# Altium PCB 388D_Control_v1_PCB1_1.PcbDoc (part 3 of 5)
Units mil, origin at the board's own origin, x right, y up, seen from the top; angles counter-clockwise.
Board outline 3431 x 3800 mil, 6 copper layers (Top Layer, Singal Layer 2, Signal layer 3, Signal Layer 4, Signal Layer 5, Bottom Layer), stack 32.7 mil thick; 270 components, 383 nets, 1462 pads, 899 vias.
Unrouted connection lines stored in the file: 19.
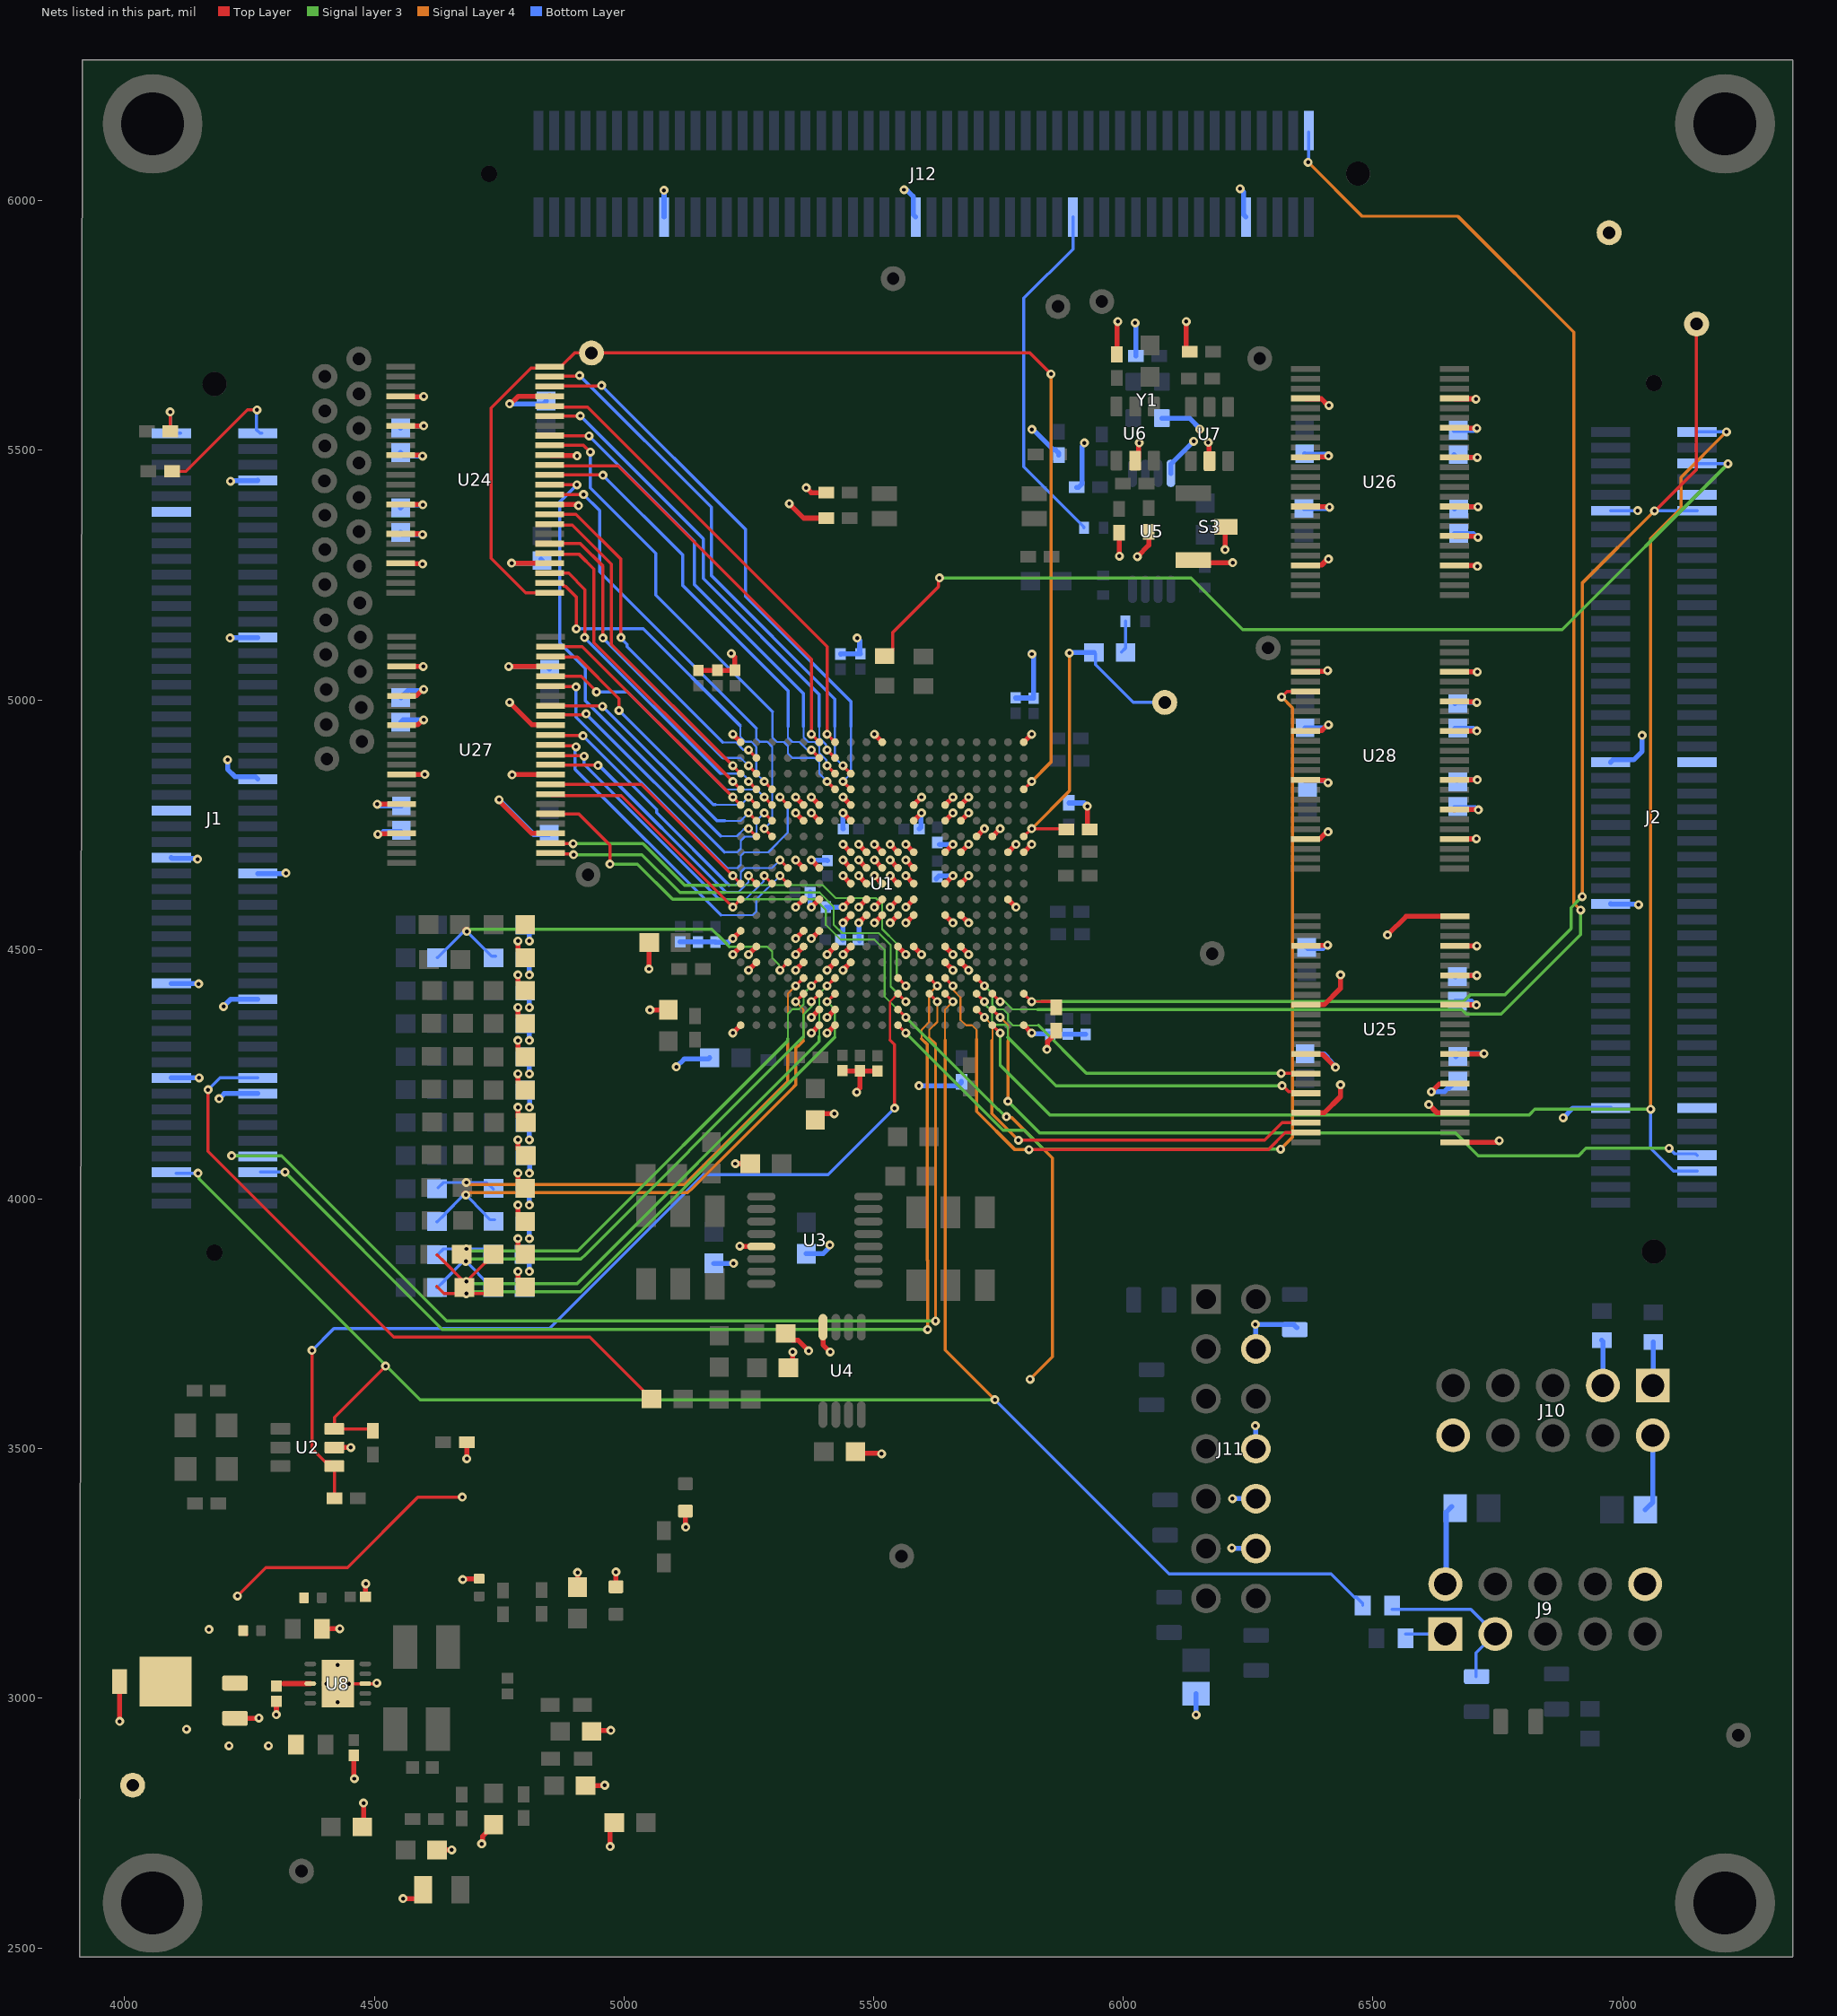
[diagram p6: the nets of this part, all layers, seen from the top]

## Via types
v1: diameter 18, hole 8, Top Layer to Bottom Layer, tented both sides, 899 vias

## Nets (pads, with @x,y where several pads share a name; then routed paths per layer and width w, separated by ;. In a path a pad name is that pad's centre, name@x,y a point inside that pad or via, vN(x,y) a via of type N, cw(c..) or ccw(c..) an arc to the next point about the centre after c; other vN are vias at no path point) (continued)
C4C5_P: C21.1 R28.1 U1.R4 | length 855.7
  Top Layer w6.25: v1(5312.45,4458.76) U1.R4@5328.2,4474.51
  Signal layer 3 w4: 5211.18,4505.74 5286.9,4505.74 5296.7,4495.93 5296.7,4484.43 ; 5296.7,4483.2 5305.77,4474.13 5310.19,4469.71 5310.19,4461.02 v1@5310.55,4460.66
  Signal layer 3 w6.25: v1(4685.32,4536.47) 4688.49,4536.47 4692.8,4540.77 5176.27,4540.77 5197.4,4519.65 5201.84,4515.2 5201.84,4515.07 5211.18,4505.74 ; v1@5310.55,4460.66 v1(5312.45,4458.76)
  Bottom Layer w6: R28.1@4626.07,4483.92 4627.06,4483.92 4677.31,4534.17 4683.02,4534.17 v1(4685.32,4536.47) 4735.11,4486.67 C21.1@4742.84,4486.67
CM_RX: J2.96 R169.2 | length 2026.1
  Top Layer w6.25: R169.2@5522.01,5087.63 5525.94,5087.63 5538.57,5100.25 5538.57,5135.57 5629.76,5226.76 5629.76,5242.25 v1(5632.01,5244.5)
  Signal layer 3 w6.25: v1(5632.01,5244.5) 6135.5,5244.5 6239,5141 6879,5141 v1(7211,5473)
  Bottom Layer w6.25: J2.96@7149.24,5473.57 7149.8,5473 v1(7211,5473)
CPU1_RX: J9.1 R165.2 | length 79.5
  Bottom Layer w6.25: R165.2@6565.53,3129 J9.1@6645,3129
CPU1_TX: J9.3 R159.1 R166.2 | length 328.1
  Bottom Layer w6.25: R166.2@6538.53,3178 6696,3178 J9.3@6744.67,3129.33 ; R159.1@6706.69,3043.78 6706.69,3091.35 J9.3@6744.67,3129.33 ; J9.3@6745,3129 J9.3@6744.67,3129.33
CPU2_RX: J10.1 R164.2 | length 87.9
  Bottom Layer w10: J10.1@7060.4,3626.64 7061.4,3627.64 R164.2@7061.4,3714.11
CPU2_TX: J10.3 R163.2 | length 91.3
  Bottom Layer w10: R163.2@6958.4,3717.11 6960.4,3715.11 J10.3@6960.4,3626.64
D0D1_N: C10.1 R32.1 U1.U5 | length 1115.1
  Top Layer w6.25: v1(5343.95,4395.77) U1.U5@5359.7,4411.52
  Signal Layer 4 w4: v1(5343.95,4395.77) 5359.4,4380.31 5359.4,4316.74
  Signal Layer 4 w6.25: v1@4682.17,4012.06 4683.51,4010.72 4688.74,4010.72 4690.8,4012.77 5127.68,4012.77 5137.19,4022.29 5334.93,4220.03 5344.45,4229.55 5344.45,4303.08 5348.11,4306.74 5349.4,4306.74 5359.4,4316.74
  Bottom Layer w6: R32.1@4625.09,3954.59 4626.07,3954.59 4641.77,3970.29 4641.77,3971.28 4676.67,4006.17 4681.02,4006.17 v1(4683.32,4008.47) 4683.49,4008.47 4721.66,3970.3 4721.66,3969.48 4732.46,3958.67 C10.1@4740.84,3958.67
D0D1_P: C22.1 R31.1 U1.T5 | length 1071.3
  Top Layer w6.25: v1(5343.95,4427.27) U1.T5@5359.7,4443.01
  Signal Layer 4 w4: 5328.2,4317.03 5328.2,4411.52 v1(5343.95,4427.27)
  Signal Layer 4 w6.25: v1(4684.43,4033.32) 4687.61,4033.32 4691.91,4029.02 5120.94,4029.02 5328.2,4236.28 5328.2,4317.03
  Bottom Layer w6: v1(4684.43,4033.32) 4724.93,4033.32 C22.1@4738.35,4019.91
  Bottom Layer w6.25: R31.1@4628.14,4022.94 4638.52,4033.32 v1(4684.43,4033.32)
D2D3_N: C11.1 R34.1 U1.U6 | length 1120.7
  Top Layer w6.25: v1(5375.44,4395.77) U1.U6@5391.19,4411.52
  Signal layer 3 w4: 5359.4,4325.43 5359.4,4369.45 5375.44,4385.49 v1(5375.44,4395.77)
  Signal layer 3 w6.25: v1(4683.32,3875.47) 4686.49,3875.47 4690.8,3879.77 4913.75,3879.77 4923.26,3889.29 5337.07,4303.09 5359.4,4325.43
  Bottom Layer w6: R34.1@4625.09,3822.41 4626.07,3822.41 4641.77,3838.11 4641.77,3839.1 4675.85,3873.17 4681.02,3873.17 v1(4683.32,3875.47) 4733.11,3825.67 C11.1@4740.84,3825.67
D2D3_P: C23.1 R33.1 U1.T6 | length 1099.8
  Top Layer w6.25: v1(5375.44,4427.27) U1.T6@5391.19,4443.01
  Signal layer 3 w4: 5328.01,4321.1 5328.2,4321.3 ; 5328.3,4321.39 5328.2,4321.3 ; v1(5375.44,4427.27) 5359.7,4411.52 5359.7,4389.92 5350.55,4380.77 5337.68,4380.77 5328.2,4371.3 5328.2,4321.3
  Signal layer 3 w6.25: v1(4684.43,3900.32) 4687.61,3900.32 4691.91,3896.02 4907.01,3896.02 5328.3,4317.3 5328.3,4321.39
  Bottom Layer w6: v1(4684.43,3900.32) 4725.67,3900.32 C23.1@4738.35,3887.64
  Bottom Layer w6.25: R33.1@4628.14,3889.94 4638.52,3900.32 v1(4684.43,3900.32)
D4D5_N: C12.1 R36.1 U1.U7 | length 1178.6
  Top Layer w6.25: 4625.18,3825.32 4639.65,3810.86 v1(4684.32,3810.86) 4726.02,3810.86 C12.1@4740.84,3825.67 ; v1(5406.94,4395.77) U1.U7@5422.69,4411.52
  Signal layer 3 w4: v1(5406.94,4395.77) 5422.4,4380.31 5422.4,4324.4
  Signal layer 3 w6.25: v1(4684.32,3810.86) 4686.56,3813.11 4692.22,3813.11 4693.85,3814.73 4912.74,3814.73 5422.4,4324.4
D4D5_P: C24.1 R35.1 U1.T7 | length 1206.7
  Top Layer w6: 4625.09,3888.5 4626.07,3888.5 4641.77,3872.8 4677.42,3837.15 4682.02,3837.15 v1(4684.32,3834.86) 4721.4,3871.94 4722.65,3871.94 C24.1@4738.35,3887.64
  Top Layer w6.25: v1(5406.94,4427.27) U1.T7@5422.69,4443.01
  Signal layer 3 w4: 5391.01,4325.91 5391.01,4411.33 v1(5406.94,4427.27)
  Signal layer 3 w6.25: v1(4684.32,3834.86) 4686.56,3832.61 4692.22,3832.61 4693.85,3830.98 4906.01,3830.98 5391.01,4315.98 5391.01,4325.91
EMU0: J1.2 R177.2 | length 99.5
  Top Layer w6.25: v1(4091.01,5577.1) 4091.01,5539.48 R177.2@4092.39,5538.1
  Bottom Layer w6.25: v1(4091.01,5577.1) 4091.01,5541.03 4097.73,5534.31 J1.2@4112.08,5534.31
EMU1: J1.1 R176.1 | length 267.1
  Top Layer w6.25: R176.1@4094.62,5458 4123,5458 4246,5581 v1(4265,5581)
  Bottom Layer w6.25: v1@4264.32,5573.21 4264.32,5541.03 4271.04,5534.31 J1.1@4275.08,5534.31
ENET_PHY_CLK: J12.31 R77.2 | length 713.3
  Bottom Layer w6.25: J12.31@5899.21,5967.39 5899.21,5903.21 5800.64,5804.64 5800.64,5467.28 5921.16,5346.77 R77.2@5921.16,5344.8
ERRORSTS: J2.90 R64.2 TP5.1 U1.U19 | length 2617.5
  Top Layer w4: v1(5816.39,4395.77) 5835.37,4395.77
  Top Layer w6.25: U1.U19@5800.64,4411.52 v1(5816.39,4395.77) ; 5835.4,4395.74 R64.2@5869.78,4395.74 ; v1@7064.44,5378.44 7148,5462 TP5.1@7148,5753
  Signal layer 3 w6.25: v1(5816.39,4395.77) 6681.31,4395.77 6694.54,4409 6764,4409 6897,4542 6897,4584 v1(6919,4606)
  Signal Layer 4 w6.25: v1(6919,4606) 6919,5234 v1(7063.95,5378.95)
  Bottom Layer w6.25: v1(7063.95,5378.95) 7149.11,5378.95 J2.90@7149.24,5379.08
F2838x_25MHZ_CLK: R83.2 R85.2 | length 65.2
  Bottom Layer w6.25: R85.2@5996.35,5095.8 6004.16,5103.61 R83.2@6004.16,5157.8
F2838x_CLK: R63.2 R85.1 TP10.1 U1.G19 | length 735
  Top Layer w6.25: U1.G19@5800.64,4726.48 v1(5816.39,4742.23) R63.2@5880.36,4742.23 ; R63.2@5873.16,4749.42 R63.2@5880.36,4742.23 ; R63.2@5884.4,4742.23 R63.2@5880.36,4742.23 ; R63.2@5885.78,4740.74 5881.85,4740.74 R63.2@5880.36,4742.23
  Signal Layer 4 w6.25: v1(5816.39,4742.23) 5892,4817.84 v1(5892,5094)
  Bottom Layer w6.25: R85.1@5941.5,5095 5944.41,5092.09 5944.41,5070.59 6020,4995 TP10.1@6083,4995
  Bottom Layer w10: v1(5892,5094) 5893,5095 R85.1@5941.5,5095
GND: C1.2 C2.2 C3.2 C4.2 C5.2 C6.2 C7.2 C8.2 C9.2 C10.2 C11.2 C12.2 C13.2 C14.2 C15.2 C16.2 C17.2 C18.2 C19.2 C20.2 C21.2 C22.2 C23.2 C24.2 C25.1 C26.2 C27.2 C28.2 C29.2 C30.2 C31.2 C32.2 C33.2 C34.2 C35.2 C37.2 C38.1 C39.1 C40.1 C41.1 C42.2 C43.2 C44.1 C45.1 C46.1 C47.1 C48.1 C49.1 C50.1 C51.1 C52.1 C53.2 C54.2 C55.1 C56.1 C57.1 C58.1 C59.1 C60.1 C61.1 C62.1 C63.1 C64.1 C65.1 C66.1 C67.1 C68.1 C69.1 C70.1 C71.1 C72.1 C73.2 C74.2 C75.2 C76.2 C77.2 C78.2 C163.2 C164.2 C165.2 C166.2 C167.2 C168.2 C169.2 C170.2 C171.2 C172.2 C173.2 C174.2 C175.2 C176.2 C177.2 C178.2 C179.2 C180.2 C181.2 C182.2 C183.2 C184.2 C185.2 J1.7 J1.27 J1.45 J1.56 J1.57 J1.72 J1.73 J1.84 J1.85 J2.13 J2.39 J2.57 J2.89 J9.2 J9.10 J10.2 J10.10 J11.4 J11.8 J11.10 J11.12 J12.9 J12.51 J12.83 LED1.1 R52.1 R53.1 R54.1 R55.1 R62.1 R63.1 R64.1 R79.2 R80.1 R82.2 R86.2 R175.1 S3.2 S3.3 TP4.1 U1.A1 U1.A10 U1.A19 U1.E5 U1.E6 U1.E8 U1.E12 U1.E14 U1.E15 U1.F5 U1.F6 U1.F8 U1.F12 U1.F14 U1.F15 U1.G16 U1.G17 U1.H8 U1.H9 U1.H10 U1.H11 U1.H12 U1.H14 U1.H15 U1.H18 U1.H19 U1.J5 U1.J6 U1.J8 U1.J9 U1.J10 U1.J11 U1.J12 U1.K8 U1.K9 U1.K10 U1.K11 U1.K12 U1.K14 U1.K15 U1.L5 U1.L6 U1.L8 U1.L9 U1.L10 U1.L11 U1.L12 U1.L18 U1.M8 U1.M9 U1.M10 U1.M11 U1.M12 U1.M14 U1.M15 U1.N1 U1.N5 U1.N6 U1.P1 U1.P2 U1.P5 U1.P7 U1.P8 U1.P11 U1.P12 U1.P14 U1.P15 U1.R2 U1.R5 U1.R7 U1.R8 U1.R14 U1.R15 U1.V6 U1.V7 U1.W1 U1.W6 U1.W7 U1.W19 U2.2 U3.13 U4.4 U5.4 U6.2 U7.2 U8.8 U8.11 U24.4 U24.10 U24.15 U24.21 U24.28 U24.34 U24.39 U24.45 U25.1 U25.4 U25.10 U25.15 U25.21 U25.24 U25.28 U25.34 U25.39 U25.45 U26.4 U26.10 U26.15 U26.21 U26.28 U26.34 U26.39 U26.45 U27.4 U27.10 U27.15 U27.21 U27.28 U27.34 U27.39 U27.45 U28.4 U28.10 U28.15 U28.21 U28.28 U28.34 U28.39 U28.45 Y1.2 | length 11506
  Top Layer w6.25: C39.1@4220.86,2960.07 C39.1@4221.96,2958.97 ; U8.11@4449.5,3029.5 U8.8@4481.98,3029.5 4503.5,3029.5 v1(4504.75,3030.75) v1@4506,3032 ; U24.45@4850.59,5608.7 U24.45@4850.99,5608.29
  Top Layer w10: C39.1@4220.86,2960.07 4268.43,2960.07 v1(4268.86,2960.5) ; v1(4303.49,2967.5) 4303.86,2967.87 C38.1@4303.86,2994.15 ; R52.1@4395.39,3139.5 v1(4430.82,3139.5) ; U2.2@4420.07,3502.55 v1(4452.93,3502.55) ; C41.1@4458.86,2885.79 4458.86,2840.14 v1(4460,2839) ; C43.2@4476,2742.35 4478.5,2744.85 v1(4478.5,2790.35) ; C40.1@4482.22,3203.5 4482.22,3228.85 v1(4482.86,3229.5) ; v1(4507.01,4731.1) 4507.76,4731.85 4553.96,4731.85 U27.21@4554.71,4732.6 ; U24.21@4552.72,5273.65 4553.48,5272.89 4595.94,5272.89 v1(4596.7,5272.13) ; U24.15@4552.72,5391.76 4553.1,5391.38 4596.62,5391.38 v1(4597,5391) ; U24.10@4552.72,5490.18 4592.48,5490.18 4594.32,5488.34 v1(4596.48,5488.34) ; U27.15@4554.71,4850.71 4554.86,4850.86 4600.86,4850.86 v1(4601,4851) ; U27.10@4554.71,4949.13 4555.62,4950.04 4586.88,4950.04 4596.84,4960 v1(4599,4960) ; U27.4@4554.71,5067.24 4554.78,5067.17 4597.94,5067.17 v1(4598.01,5067.1) ; U24.4@4555.4,5607.29 4597.86,5607.29 v1(4598.7,5608.13) ; v1(4557.5,2598.85) 4584.88,2598.85 4597.6,2611.56 LED1.1@4597.6,2616.35 ; R54.1@4625.49,2696.35 v1(4655.02,2696.35) ; v1(4677,3238) 4678.72,3239.72 R53.1@4710,3239.72 ; v1(4685,3480) 4685.24,3480.24 C73.2@4685.24,3513 ; v1(4715,2708.35) 4716.53,2709.88 4716.53,2723.4 4739,2745.87 C35.2@4739,2746.85 ; v1(4750,4800) 4751.53,4798.47 4751.53,4796.04 4814.97,4732.6 U27.28@4852.98,4732.6 ; v1(4769.09,5067.09) 4852.86,5067.12 U27.45@4852.98,5067.24 ; v1(4771,4995) 4815.96,4950.04 4852.08,4950.04 U27.39@4852.98,4949.13 ; v1(4771,5593) 4773.16,5593 4788.31,5608.15 4850.04,5608.15 U24.45@4850.59,5608.7 ; v1(4775.09,5273.91) 4775.18,5273.82 4850.82,5273.82 U24.28@4850.99,5273.65 ; v1(4776,4850) 4776.36,4850.36 4852.63,4850.36 U27.34@4852.98,4850.71 ; v1(4787.47,3854.97) 4787.47,3835.21 4801.25,3821.44 C12.2@4802.32,3821.44 ; v1(4787.47,3987.97) 4787.47,3967.48 4800.51,3954.44 C16.2@4802.32,3954.44 ; v1(4787.47,4051.97) 4787.47,4033.29 C4.2@4802.32,4018.44 ; v1(4787.47,4118.97) 4787.47,4099.74 4801.78,4085.44 C7.2@4802.32,4085.44 ; v1(4787.47,4250.97) 4787.47,4232.01 4802.04,4217.44 C5.2@4802.32,4217.44 ; v1@4787.64,3920.81 4787.64,3901.14 4801.34,3887.44 C24.2@4802.32,3887.44 ; v1@4787.64,4183.81 4787.64,4164.14 4801.34,4150.44 C19.2@4802.32,4150.44 ; v1@4787.64,4317.81 4787.64,4298.14 4801.34,4284.44 C17.2@4802.32,4284.44 ; v1@4787.64,4383.81 4787.64,4364.14 4801.34,4350.44 C13.2@4802.32,4350.44 ; v1@4787.64,4448.81 4787.64,4429.14 4801.34,4415.44 C1.2@4802.32,4415.44 ; v1@4787.64,4516.81 4787.64,4497.14 4801.34,4483.44 C20.2@4802.32,4483.44 ; U24.34@4852.36,5391.44 4852.67,5391.76 4904.08,5391.76 4906.84,5389 v1(4909,5389) ; U24.39@4853.18,5490.59 4854.18,5489.59 4905.41,5489.59 v1(4906,5489) ; C37.2@4907,3222.5 v1(4907,3252.02) ; C53.2@4922.99,2825 4960.5,2825 v1(4961.5,2826) ; C42.2@4935.24,2934 4937.24,2936 v1(4973.75,2936) ; v1(4972.4,2703.23) C54.2@4972.4,2750.23 ; C71.1@4984,3223.56 v1(4984,3253) ; v1(5050.01,4461.1) 5050.51,4461.61 C28.2@5050.51,4514.1 ; v1(5052,4379) 5088.41,4379 C26.2@5089.01,4379.6 ; C72.1@5123,3374.94 5123,3343.5 v1(5123.5,3343) ; C66.1@5149.11,5059.03 5149.32,5059.24 5221.8,5059.24 C70.1@5222.01,5059.46 5222.01,5085.99 v1(5215,5093) ; v1(5217.97,4332.78) U1.W1@5233.71,4348.52 ; v1(5217.97,4490.26) U1.P1@5233.71,4506.01 ; v1(5217.97,4521.75) U1.N1@5233.71,4537.5 ; v1(5217.97,4931.2) U1.A1@5233.71,4915.45 ; v1(5222.98,4071.1) C25.1@5252.51,4071.1 ; v1(5232,3906) 5232.43,3905.57 5274.6,3905.57 U3.13@5275.03,3905.15 ; v1(5249.46,4458.76) U1.R2@5265.21,4474.51 ; v1(5249.46,4490.26) U1.P2@5265.21,4506.01 ; C33.2@5323.95,3730.9 5337.65,3717.2 5348.8,3717.2 v1(5370,3696) ; C32.2@5329.5,3662 5338,3670.5 v1(5338,3694) ; v1(5331.01,5393.1) 5359.9,5364.21 R80.1@5405.07,5364.21 ; v1(5343.95,4458.76) U1.R5@5359.7,4474.51 ; v1(5343.95,4490.26) U1.P5@5359.7,4506.01 ; v1(5343.95,4521.75) U1.N5@5359.7,4537.5 ; v1(5343.95,4584.74) U1.L5@5359.7,4600.49 ; v1(5343.95,4679.23) U1.J5@5359.7,4663.48 ; v1(5343.95,4773.72) U1.F5@5359.7,4757.97 ; v1(5343.95,4805.22) U1.E5@5359.7,4789.47 ; v1(5365.01,5425.1) 5374.9,5415.21 R79.2@5405.07,5415.21 ; v1@5375.44,4330.61 v1(5375.44,4332.78) U1.W6@5391.19,4348.52 ; v1(5375.44,4364.27) U1.V6@5391.19,4380.02 ; v1(5375.44,4521.75) U1.N6@5391.19,4537.5 ; v1(5375.44,4584.74) U1.L6@5391.19,4600.49 ; v1(5375.44,4679.23) U1.J6@5391.19,4663.48 ; v1(5375.44,4773.72) U1.F6@5391.19,4757.97 ; v1(5375.44,4805.22) U1.E6@5391.19,4789.47 ; C27.2@5383.01,4158.61 5395.4,4171 v1(5421,4171) ; U4.4@5398.61,3743.6 5398.61,3708.39 v1(5413,3694) ; v1(5406.94,4332.78) U1.W7@5422.69,4348.52 ; v1(5406.94,4364.27) U1.V7@5422.69,4380.02 ; v1(5406.94,4458.76) U1.R7@5422.69,4474.51 ; v1(5406.94,4490.26) U1.P7@5422.69,4506.01 ; C58.1@5437.64,4257.33 5437.99,4256.98 C61.1@5472.64,4256.98 ; v1(5438.44,4458.76) U1.R8@5454.19,4474.51 ; v1(5438.44,4490.26) U1.P8@5454.19,4506.01 ; v1(5438.44,4553.25) U1.M8@5454.19,4569 ; v1(5438.44,4584.74) U1.L8@5454.19,4600.49 ; v1(5438.44,4647.74) U1.K8@5454.19,4631.99 ; v1(5438.44,4679.23) U1.J8@5454.19,4663.48 ; v1(5438.44,4710.73) U1.H8@5454.19,4694.98 ; v1(5438.44,4773.72) U1.F8@5454.19,4757.97 ; v1(5438.44,4805.22) U1.E8@5454.19,4789.47 ; v1(5466,4214) 5466,4216.16 5472.39,4222.56 5472.39,4256.73 C61.1@5472.64,4256.98 ; v1(5469.93,4553.25) U1.M9@5485.68,4569 ; v1(5469.93,4584.74) U1.L9@5485.68,4600.49 ; v1(5469.93,4647.74) U1.K9@5485.68,4631.99 ; v1(5469.93,4679.23) U1.J9@5485.68,4663.48 ; v1(5469.93,4710.73) U1.H9@5485.68,4694.98 ; C34.2@5481.61,3490.61 5515.39,3490.61 v1(5516,3490) ; v1(5501.43,4553.25) U1.M10@5517.18,4569 ; v1(5501.43,4584.74) U1.L10@5517.18,4600.49 ; v1(5501.43,4647.74) U1.K10@5517.18,4631.99 ; v1(5501.43,4679.23) U1.J10@5517.18,4663.48 ; v1(5501.43,4710.73) U1.H10@5517.18,4694.98 ; v1(5501.43,4931.2) U1.A10@5517.18,4915.45 ; C62.1@5507.64,4256.62 5507.28,4256.98 C61.1@5472.64,4256.98 ; v1(5532.93,4553.25) U1.M11@5548.67,4569 ; v1(5532.93,4584.74) U1.L11@5548.67,4600.49 ; v1(5532.93,4647.74) U1.K11@5548.67,4631.99 ; v1(5532.93,4679.23) U1.J11@5548.67,4663.48 ; v1(5532.93,4710.73) U1.H11@5548.67,4694.98 ; U1.P11@5548.67,4506.01 v1(5564.42,4490.26) ; v1(5564.42,4553.25) U1.M12@5580.17,4569 ; v1(5564.42,4584.74) U1.L12@5580.17,4600.49 ; v1(5564.42,4647.74) U1.K12@5580.17,4631.99 ; v1(5564.42,4679.23) U1.J12@5580.17,4663.48 ; v1(5564.42,4710.73) U1.H12@5580.17,4694.98 ; U1.P12@5580.17,4506.01 v1(5595.92,4490.26) ; U1.F12@5580.17,4757.97 v1(5595.92,4773.72) ; U1.E12@5580.17,4789.47 v1(5595.92,4805.22) ; U1.R14@5643.16,4474.51 v1(5658.91,4458.76) ; U1.P14@5643.16,4506.01 v1(5658.91,4490.26) ; U1.M14@5643.16,4569 v1(5658.91,4553.25) ; U1.K14@5643.16,4631.99 v1(5658.91,4647.74) ; U1.H14@5643.16,4694.98 v1(5658.91,4710.73) ; U1.F14@5643.16,4757.97 v1(5658.91,4773.72) ; U1.E14@5643.16,4789.47 v1(5658.91,4805.22) ; U1.R15@5674.66,4474.51 v1(5690.4,4458.76) ; U1.P15@5674.66,4506.01 v1(5690.4,4490.26) ; U1.M15@5674.66,4569 v1(5690.4,4553.25) ; U1.K15@5674.66,4631.99 v1(5690.4,4647.74) ; U1.H15@5674.66,4694.98 v1(5690.4,4710.73) ; U1.F15@5674.66,4757.97 v1(5690.4,4773.72) ; U1.E15@5674.66,4789.47 v1(5690.4,4805.22) ; U1.G16@5706.15,4726.48 v1(5721.9,4742.23) ; U1.G17@5737.65,4726.48 v1(5753.4,4742.23) ; U1.L18@5769.15,4600.49 v1(5784.89,4584.74) ; U1.H18@5769.15,4694.98 v1(5784.89,4710.73) ; U1.W19@5800.64,4348.52 v1(5816.39,4332.78) ; U1.H19@5800.64,4694.98 v1(5816.39,4710.73) ; U1.A19@5800.64,4915.45 v1(5816.39,4931.2) ; v1(5847,4300) 5848.53,4301.53 5848.53,4315.7 5866.01,4333.18 R64.1@5866.01,4337.11 ; v1(5928,4787) 5928,4745.76 R63.1@5933.03,4740.74 ; C76.2@5986.72,5692.19 5987.86,5693.33 5987.86,5756.86 v1(5989,5758) ; C74.2@5991.72,5335.09 5991.86,5334.94 5991.86,5288.25 v1(5992.01,5288.1) ; U6.2@6023.72,5479.58 6030.47,5486.33 6030.47,5513.47 v1(6032,5515) ; v1(6028,5287) 6051.2,5310.2 6051.2,5336.6 C75.2@6050.72,5337.09 ; v1(6126,5758) 6126,5704.69 C77.2@6132.79,5697.9 ; S3.2@6140.42,5279.91 6145.23,5275.1 v1(6219.01,5275.1) ; v1(6170,5516) 6171.36,5514.64 6171.36,5479.93 U7.2@6172.72,5478.58 ; v1(6204,5301) 6204,5345.47 S3.3@6205.38,5346.84 ; U28.39@6364.42,4839.26 6365.02,4838.67 6403.28,4838.67 6407.84,4834.1 v1(6410.01,4834.1) ; U28.28@6364.42,5055.8 6365.64,5057.01 6405.07,5057.01 6406.84,5058.78 v1(6409.01,5058.78) ; U28.45@6364.87,4721.46 6365.78,4722.37 6394.2,4722.37 6407.84,4736 v1(6410,4736) ; U26.34@6364.87,5485.99 6365.78,5486.9 6406.74,5486.9 6408.84,5489 v1(6411,5489) ; U28.34@6364.87,4937.99 6365.74,4938.9 6397.74,4938.9 6408.84,4950 v1(6411,4950) ; U26.45@6365.46,5269.46 6366.37,5270.37 6397.2,5270.37 6408.84,5282 v1(6411,5282) ; U26.39@6365.46,5387.57 6366.2,5386.84 6412.27,5386.84 v1(6413.01,5386.1) ; U26.28@6365.46,5604.1 6366.37,5603.2 6396.64,5603.2 6409.84,5590 v1(6412,5590) ; U25.45@6365.74,4172.77 6402.34,4172.77 6435,4205.43 v1(6435,4229) ; U25.34@6365.74,4389.3 6402.11,4389.3 6435,4422.19 v1(6435,4449) ; U25.39@6366.65,4289.97 6399.03,4289.97 v1(6425,4264) ; U25.28@6366.65,4508.32 6366.76,4508.21 6408.21,4508.21 v1(6409,4509) ; v1(6529.2,4529.2) 6566.47,4566.47 U25.24@6664.01,4566.47 ; v1@6612,4189.34 6628.21,4173.12 6663.65,4173.12 U25.4@6664.01,4172.77 ; U25.1@6640.88,4113.71 6747.55,4113.71 6750.84,4117 v1(6753,4117) ; U28.10@6661.58,4839.68 6661.69,4839.79 6708.79,4839.79 v1(6709,4840) ; U28.4@6661.68,4721.68 6661.73,4721.73 6706.73,4721.73 v1(6707,4722) ; U28.15@6662,4938 v1(6708,4938) ; U28.21@6662.07,5056.07 v1@6708.93,5056.07 ; U26.4@6663.14,5269.46 6707.54,5269.46 v1(6709.09,5267.91) ; U26.10@6663.14,5387.57 6663.43,5387.29 6709.71,5387.29 v1(6710,5387) ; U26.15@6663.14,5485.99 6663.25,5485.89 6708.9,5485.89 v1(6709.01,5485.78) ; U26.21@6663.14,5604.1 6663.95,5603.3 6705.49,5603.3 v1(6706.3,5602.49) ; U25.10@6664.01,4290.88 6721.88,4290.88 v1(6722.44,4291.44) v1@6723,4292 ; U25.15@6664.01,4389.3 6664.16,4389.15 6706.85,4389.15 v1(6707,4389) ; U25.21@6664.01,4507.41 v1@6707.59,4507.41 ; v1@6708.93,5056.07 v1(6708.97,5056.03)
  Bottom Layer w6.25: v1(4507.01,4731.1) 4510.19,4731.1 4517.58,4738.5 C168.2@4554.01,4738.5 ; J2.89@6976.01,5379.08 v1(7029.92,5379.08) v1@7030,5379
  Bottom Layer w10: J1.84@4093.47,4242.97 v1(4148.97,4242.97) ; J1.72@4093.47,4431.95 4147.05,4431.95 v1(4148,4431) ; J1.56@4093.47,4683.92 4094.93,4682.46 4144.54,4682.46 v1(4146,4681) ; v1(4189,4201) 4199.48,4211.48 J1.85@4266.7,4211.48 ; v1(4198,4386) 4212.45,4400.45 J1.73@4266.7,4400.45 ; v1(4206,4880) 4206,4861 4220.76,4846.24 4261.85,4846.24 J1.45@4266.7,4841.4 ; v1(4211,5124) 4211.43,5124.43 4266.27,5124.43 J1.27@4266.7,5124.86 ; v1(4212,5438) 4212.91,5438.91 4265.79,5438.91 J1.7@4266.7,5439.82 ; J1.57@4266.7,4652.42 4322.42,4652.42 v1(4323,4653) ; C167.2@4552.7,5384.74 4558.96,5391 v1(4597,5391) ; C166.2@4552.7,5495.53 4559.88,5488.34 v1(4596.48,5488.34) ; C169.2@4553.01,4955.5 4557.51,4960 v1(4599,4960) ; v1(4750,4800) 4819.61,4730.39 C173.2@4850,4730.39 ; v1(4769.09,5067.09) 4845.62,5067.09 C172.2@4851.01,5061.71 ; v1(4771,5593) 4838.3,5593 C171.2@4844.01,5598.71 ; v1(4775.09,5273.91) 4821.85,5273.91 C170.2@4821.94,5273.82 ; v1(4787.47,3854.97) v1@4787.64,3854.81 ; v1(4787.47,3920.97) v1@4787.64,3920.81 ; v1(4787.47,3987.97) v1@4787.64,3987.81 ; v1(4787.47,4051.97) v1@4787.64,4051.81 ; v1(4787.47,4118.97) v1@4787.64,4118.81 ; v1(4787.47,4183.97) v1@4787.64,4183.81 ; v1(4787.47,4250.97) v1@4787.64,4250.81 ; v1(4787.47,4317.97) v1@4787.64,4317.81 ; v1(4787.47,4383.97) v1@4787.64,4383.81 ; v1(4787.47,4448.97) v1@4787.64,4448.81 ; v1(4787.47,4516.97) v1@4787.64,4516.81 ; C23.2@4802.32,3887.57 4810.47,3879.42 v1(4810.47,3854.97) ; C10.2@4802.32,3953.57 4810.47,3945.42 v1(4810.47,3920.97) ; C22.2@4802.32,4020.57 4810.47,4012.42 v1(4810.47,3987.97) ; C6.2@4802.32,4084.57 4811.04,4075.85 4811.04,4052.54 v1(4810.47,4051.97) ; C18.2@4802.32,4151.57 4810.47,4143.42 v1(4810.47,4118.97) ; C14.2@4802.32,4216.57 4811.3,4207.59 4811.3,4184.81 v1(4810.47,4183.97) ; C2.2@4802.32,4283.57 4810.47,4275.42 v1(4810.47,4250.97) ; C15.2@4802.32,4350.57 4810.47,4342.42 v1(4810.47,4317.97) ; C3.2@4802.32,4416.57 4810.47,4408.42 v1(4810.47,4383.97) ; C21.2@4802.32,4481.57 4810.47,4473.42 v1(4810.47,4448.97) ; C9.2@4802.32,4549.57 4810.47,4541.42 v1(4810.47,4516.97) ; C170.2@4833.39,5282 C170.2@4836,5279.39 ; v1(5080,6021) 5080.31,6020.69 J12.83@5080.31,5967.39 ; v1(5104.91,4264.91) 5120.7,4280.7 5169.11,4280.7 C29.2@5171.51,4283.1 ; C68.1@5112.38,4515.31 5112.59,4515.1 5183.06,4515.1 C67.1@5183.28,4514.89 5208.94,4514.89 5215.8,4521.75 v1(5217.97,4521.75) ; C30.2@5180,3871.5 v1(5219.3,3871.5) 5219.5,3871.5 v1@5220,3871 ; C31.2@5365,3890.5 5398.7,3890.5 5410.47,3902.27 5410.47,3906.47 v1(5412,3908) ; C48.1@5372.76,4614.74 5372.76,4589.6 5375.44,4586.91 v1(5375.44,4584.74) ; v1(5375.44,4679.23) 5376.02,4678.66 5406.84,4678.66 C50.1@5407.4,4678.09 ; C52.1@5408.15,4583.53 5408.15,4580.56 5403.96,4584.74 v1(5438.44,4584.74) ; C63.1@5433.59,5091.95 5433.84,5092.2 5473.35,5092.2 C64.1@5473.59,5092.44 5472.14,5093.9 5472.14,5118.86 v1(5467,5124) ; C51.1@5438.4,4518.74 v1(5438.44,4553.25) ; v1(5438.44,4773.72) 5438.74,4773.41 5438.74,4742.05 C45.1@5439.05,4741.74 ; v1(5469.93,4553.25) 5470.99,4552.19 5470.99,4518.8 C49.1@5472.05,4517.74 ; v1(5561,6022) 5562.53,6020.47 5567.5,6020.47 5579.41,6008.56 5579.41,5972.23 J12.51@5584.25,5967.39 ; v1(5590.71,4227.29) 5669.2,4227.29 5676.01,4234.1 R62.1@5676.01,4235.48 ; C44.1@5591.4,4741.74 5594.39,4744.72 5594.39,4772.19 v1(5595.92,4773.72) ; v1@5594.39,4491.79 v1(5595.92,4490.26) ; C47.1@5625.4,4641.38 5625.4,4642.11 5631.03,4647.74 v1(5658.91,4647.74) ; C46.1@5632.03,4710.45 5632.82,4710.45 5633.1,4710.73 v1(5658.91,4710.73) ; C56.1@5784.4,5004.09 5784.63,5003.86 5819.96,5003.86 C57.1@5820.19,5003.64 5820.19,5088.81 v1(5817.09,5091.91) v1@5814,5095 ; v1(5816.39,4332.78) 5817.76,4331.4 5852.06,4331.4 C60.1@5853.43,4330.03 C55.1@5924.43,4330.03 ; v1@5819.13,5542 5860.25,5500.88 5864.19,5500.88 5871,5494.07 C78.2@5871,5490.13 ; R55.1@5891,4793.62 5921.38,4793.62 v1(5928,4787) ; R86.2@5906.38,5426 5910.32,5426 5917.13,5432.81 5917.13,5507.96 5922,5512.84 v1(5922,5515) ; v1(6023.52,5755.48) 6025.04,5753.96 R82.2@6025.04,5688.95 ; Y1.2@6077.21,5564.53 6132.47,5564.53 v1@6153.5,5543.5 ; U5.4@6095.23,5453.94 6095.23,5472.23 v1(6141,5518) ; C165.2@6145.5,3009.54 6145.5,2967.5 v1(6146,2967) ; v1(6217.5,3301) 6218,3300.5 6265,3300.5 J11.12@6265.5,3300 ; v1(6218.5,3400) J11.10@6265.5,3400 ; v1(6234,6024) 6240.83,6017.17 6240.83,5972.23 J12.9@6245.67,5967.39 ; v1(6264.5,3546) 6265,3545.5 6265,3500.5 J11.8@6265.5,3500 ; J11.4@6276.5,3702 6265,3713.5 6265,3748.5 v1(6264.5,3749) 6314.52,3749 6315,3748.53 6341.54,3748.53 R175.1@6347.54,3742.53 ; C179.2@6362.01,5383.39 6408.13,5383.39 6410.84,5386.1 v1(6413.01,5386.1) ; C178.2@6363.01,5493.18 6364.19,5492 6405.84,5492 6408.84,5489 v1(6411,5489) ; C185.2@6364.01,4290.99 6364.17,4290.83 6402.17,4290.83 6409.33,4283.67 6409.33,4281.84 6425,4266.16 v1(6425,4264) ; C181.2@6364.01,4838.39 6403.56,4838.39 6407.84,4834.1 v1(6410.01,4834.1) ; C180.2@6364.01,4944.18 6403.01,4944.18 6408.84,4950 v1(6411,4950) ; C184.2@6367.01,4504.39 6369.3,4502.1 6399.94,4502.1 6406.84,4509 v1(6409,4509) ; J9.2@6646.69,3231.35 6646.69,3373.15 C163.2@6657.54,3384 ; C175.2@6662,5491.39 6667.61,5485.78 v1(6709.01,5485.78) ; C174.2@6663.01,5382.39 6667.62,5387 v1(6710,5387) ; C177.2@6664.01,4943.18 6700.66,4943.18 6705.84,4938 v1(6708,4938) ; C182.2@6665,4396.39 6697.45,4396.39 6704.84,4389 v1(6707,4389) ; C183.2@6666,4285.61 6671.83,4291.44 v1(6722.44,4291.44) ; C176.2@6667.61,4838.78 6668.83,4840 v1(6709,4840) ; v1(6881,4163) 6900.23,4182.23 J2.13@6976.01,4182.23 ; J2.39@6976.01,4591.68 6976.85,4590.84 7031.16,4590.84 v1(7032,4590) ; J2.57@6976.01,4875.14 6980.85,4879.98 7021.98,4879.98 7039,4897 v1(7039,4929) ; C164.2@7045.46,3378 7060.4,3392.93 J10.2@7060.4,3526.64
  other v1: 6612,4189.63 6708,4507 5817,5542 6153,5542
HSEC_5V0: D1.2 J1.12 J1.50 J2.14 J2.58 J2.92 TP1.1 | length 79.6
  Top Layer w10: D1.2@3989.86,3033.5 3989.86,2954.14 v1(3990,2954)
HSEC_ADC-VREFHI: J1.83 R41.1 | length 1326.6
  Top Layer w6.25: v1(4167,4219) 4167,4096 4539,3724 4931.36,3724 R41.1@5055.46,3599.9
  Bottom Layer w6.25: v1(4167,4219) 4190.97,4242.97 J1.83@4266.7,4242.97
IN_5V0: C38.2 C39.2 C166.1 C167.1 C168.1 C169.1 C174.1 C175.1 C176.1 C177.1 C182.1 C183.1 D1.1 R45.2 R46.2 R51.2 U8.3 U24.7 U24.18 U25.7 U25.18 U26.7 U26.18 U27.7 U27.18 U28.7 U28.18 | length 1551.2
  Top Layer w6.25: v1(4226,3205) 4283,3262 4446,3262 4587,3403 v1(4676,3403) ; R51.2@4237.43,3135.5 4237.43,3134.52 R51.2@4244.15,3127.8
  Top Layer w10: 4318.84,3029.5 U8.3@4371.74,3029.5 ; v1(4506.01,4791.1) 4506.28,4791.38 4554.44,4791.38 U27.18@4554.71,4791.65 ; U24.18@4552.72,5332.7 4592.96,5332.7 4594.53,5331.13 v1(4596.7,5331.13) ; U24.7@4552.72,5549.24 v1@4598.59,5549.24 ; U27.7@4554.71,5008.19 4555.62,5009.1 4584.93,5009.1 4596.84,5021 v1(4599,5021) ; v1(6617,4215) 6632.92,4230.92 6663.1,4230.92 U25.7@6664.01,4231.82 ; U28.18@6661.77,4996.92 6662.54,4996.15 6706.85,4996.15 v1(6708,4995) ; U28.7@6662.77,4780 6663.03,4780.26 6710.74,4780.26 v1(6711,4780) ; U26.7@6663.14,5328.52 6664.05,5327.61 6706.23,5327.61 6707.84,5326 v1(6710,5326) ; U26.18@6663.14,5545.05 6663.67,5544.53 6707.47,5544.53 v1(6708,5544) ; U25.18@6664.01,4448.36 6707.64,4448.36 v1(6707.82,4448.18) v1(6708,4448)
  Bottom Layer w10: v1(4506.01,4791.1) 4508.17,4791.1 4511.57,4787.71 C168.1@4554.01,4787.71 ; C167.1@4552.7,5335.53 4557.09,5331.13 v1(4596.7,5331.13) ; C166.1@4552.7,5544.74 4557.09,5549.13 v1(4598.7,5549.13) ; C169.1@4553.01,5004.71 4566.71,5018.41 4594.24,5018.41 4596.84,5021 v1(4599,5021) ; v1(6617,4215) 6642.55,4215 6650.24,4222.69 6652.3,4222.69 6657.64,4228.03 C183.1@6657.64,4230.09 ; C175.1@6662.01,5540.39 6702.22,5540.39 6705.84,5544 v1(6708,5544) ; C176.1@6663.01,4784.18 6704.66,4784.18 6708.84,4780 v1(6711,4780) ; C174.1@6663.01,5333.18 6700.66,5333.18 6707.84,5326 v1(6710,5326) ; C177.1@6664.01,4992.39 6666.62,4995 v1(6708,4995) ; C182.1@6665,4445.61 6667.57,4448.18 v1(6707.82,4448.18)
  other v1: 4209,2905 4288,2905 4124,2938 4169,3138
MCU_GPIO0: U1.C8 U24.47 | length 1079
  Top Layer w6.25: U24.47@4855.37,5647.9 4856.31,5648.83 4909.83,5648.83 v1(4911,5650) ; v1(5438.44,4868.21) U1.C8@5454.19,4852.46
  Bottom Layer w4: 5422.4,4946.95 5422.4,4884.24 v1(5438.44,4868.21)
  Bottom Layer w6.25: v1(4911,5650) 5175.01,5385.99 5175.01,5249.13 5422.4,5001.74 5422.4,4946.95
MCU_GPIO1: U1.D8 U24.46 | length 1132.1
  Top Layer w6.25: U24.46@4852.82,5628.13 4853.73,5629.04 4953.95,5629.04 v1(4955.01,5630.1) ; v1(5438.44,4836.71) U1.D8@5454.19,4820.97
  Bottom Layer w4: v1(5438.44,4836.71) 5454.4,4852.68 5454.4,4946.54
  Bottom Layer w6.25: v1(4955.01,5630.1) 5243.01,5342.1 5243.01,5208.13 5454.4,4996.74 5454.4,4946.54
MCU_GPIO2: U1.A7 U24.44 | length 952.4
  Top Layer w6.25: U24.44@4851.83,5587.77 4852.83,5586.77 4927.23,5586.77 5406.94,5107.06 v1(5406.94,4931.2) U1.A7@5422.69,4915.45
MCU_GPIO3: U1.B7 U24.43 | length 958.2
  Top Layer w6.25: U24.43@4850.99,5568.92 4851.1,5569.03 4912.59,5569.03 v1(4912.7,5569.13) ; v1(5406.94,4899.7) U1.B7@5422.69,4883.96
  Bottom Layer w4: 5391.19,4946.95 5391.19,4923.95 5404.58,4910.56 5404.58,4902.06 v1(5406.94,4899.7)
  Bottom Layer w6.25: v1(4912.7,5569.13) 5159.01,5322.82 5159.01,5243.13 5391.19,5010.95 5391.19,4946.95
MCU_GPIO4: U1.C7 U24.41 | length 966.2
  Top Layer w6.25: U24.41@4852.25,5529.55 4852.53,5529.28 4929.72,5529.28 v1(4930,5529) ; v1(5406.94,4868.21) U1.C7@5422.69,4852.46
  Bottom Layer w4: 5359.7,4946.95 5359.7,4925.44 5369.4,4915.74 5382.4,4915.74 5391.4,4906.74 5391.4,4893.74 5405.33,4879.81 5405.33,4869.82 v1(5406.94,4868.21)
  Bottom Layer w6.25: v1(4930,5529) 5141.01,5317.99 5141.01,5231.13 5359.7,5012.44 5359.7,4946.95
MCU_GPIO5: U1.D7 U24.40 | length 1000.2
  Top Layer w6.25: U24.40@4850.99,5509.87 4919.13,5509.87 v1(4932.5,5496.5) ; v1(5406.94,4836.71) U1.D7@5422.69,4820.97
  Bottom Layer w4: 5297.4,4976.7 5297.4,4924.74 5306.4,4915.74 5320.4,4915.74 5328.4,4907.74 5328.4,4892.74 5337.4,4883.74 5382.4,4883.74 5391.4,4874.74 5391.4,4852.25 v1(5406.94,4836.71)
  Bottom Layer w6.25: v1(4932.5,5496.5) 4932.5,5425.09 5064.01,5293.58 5064.01,5210.1 5297.4,4976.7
MCU_GPIO6: U1.A6 U24.38 | length 857.6
  Top Layer w6.25: U24.38@4850.83,5468.66 4988.45,5468.66 5375.44,5081.66 v1(5375.44,4931.2) U1.A6@5391.19,4915.45
MCU_GPIO7: U1.B6 U24.37 | length 863.7
  Top Layer w6.25: U24.37@4853.1,5450.96 4853.52,5450.55 4957.56,5450.55 v1(4957.83,5450.28) ; v1(5375.44,4899.7) U1.B6@5391.19,4883.96
  Bottom Layer w4: 5328.4,4946.95 5328.4,4924.74 5337.4,4915.74 5351.26,4915.74 5367.3,4899.7 v1(5375.44,4899.7)
  Bottom Layer w6.25: v1(4957.83,5450.28) 5118.01,5290.1 5118.01,5228.99 5328.4,5018.6 5328.4,4946.95
MCU_GPIO8: U1.G2 U24.36 | length 991.3
  Top Layer w6.25: U24.36@4850.99,5431.13 v1(4905.87,5431.13) v1@4906,5431 ; v1(5249.46,4742.23) U1.G2@5265.21,4726.48
  Bottom Layer w4: 5193.9,4727.1 5226.01,4727.1 5240.01,4741.1 5248.34,4741.1 v1(5249.46,4742.23)
  Bottom Layer w6.25: v1(4905.87,5431.13) 4871,5396.13 4871,5115 4923,5063 4923,4998 5193.9,4727.1
MCU_GPIO9: U1.G3 U24.35 | length 931.5
  Top Layer w6.25: U24.35@4850.99,5411.44 v1(4919.01,5411.44) ; v1(5280.96,4742.23) U1.G3@5296.7,4726.48
  Bottom Layer w4: 5265.01,4943.1 5265.01,4923.1 5272.01,4916.1 5287.01,4916.1 5297.01,4906.1 5297.01,4758.28 v1(5280.96,4742.23)
  Bottom Layer w6.25: v1(4919.01,5411.44) 4951.01,5379.44 4951.01,5257.1 5265.01,4943.1
MCU_GPIO10: U1.B2 U24.33 | length 708.2
  Top Layer w6.25: U24.33@4854.79,5372.07 4904.04,5372.07 4994,5282.11 v1(4994,5125) ; v1(5249.46,4899.7) U1.B2@5265.21,4883.96
  Bottom Layer w4: 5197.9,4915.1 5224.01,4915.1 5239.4,4899.7 v1(5249.46,4899.7)
  Bottom Layer w6.25: v1(4994,5125) 4994,5123.42 5006.2,5111.22 5006.2,5106.8 5197.9,4915.1
MCU_GPIO11: U1.C1 U24.32 | length 683.5
  Top Layer w6.25: U24.32@4850.83,5350.55 4896.56,5350.55 4975,5272.11 4975,5111.17 v1(5217.97,4868.21) U1.C1@5233.71,4852.46
MCU_GPIO12: U1.C2 U24.30 | length 687.5
  Top Layer w6.25: U24.30@4852.84,5313.07 4912.93,5313.07 4958,5268 v1(4958,5124) ; v1(5249.46,4868.21) U1.C2@5265.21,4852.46
  Bottom Layer w4: 5202.22,4883.96 5233.71,4883.96 v1(5249.46,4868.21)
  Bottom Layer w6.25: v1(4958,5124) 5198.04,4883.96 5202.22,4883.96
MCU_GPIO13: U1.D1 U24.29 | length 664.1
  Top Layer w6.25: U24.29@4850.83,5291.49 4910.51,5291.49 4940,5262 4940,5114.68 v1(5217.97,4836.71) U1.D1@5233.71,4820.97
MCU_GPIO14: U1.D2 U24.27 | length 653
  Top Layer w6.25: U24.27@4851.66,5253.96 4889.04,5253.96 4922,5221 4922,5126 v1(4921,5125) ; v1(5249.46,4836.71) U1.D2@5265.21,4820.97
  Bottom Layer w4: 5193.54,4852.46 5236.65,4852.46 5243.4,4845.7 5243.4,4846.06 5249.46,4840 v1(5249.46,4836.71)
  Bottom Layer w6.25: v1(4921,5125) 5193.54,4852.46
MCU_GPIO15: U1.D3 U24.26 | length 697.6
  Top Layer w6.25: U24.26@4851.83,5233.44 4874.96,5233.44 4880.78,5227.62 4882.98,5227.62 4905,5205.6 4905,5143 v1(4904.5,5142.5) ; v1(5280.96,4836.71) U1.D3@5296.7,4820.97
  Bottom Layer w4: 5233.01,4948.1 5233.01,4926.1 5243.01,4916.1 5255.01,4916.1 5265.01,4906.1 5265.01,4852.66 v1(5280.96,4836.71)
  Bottom Layer w6.25: v1(4904.5,5142.5) 5038.61,5142.5 5233.01,4948.1
MCU_GPIO16: U1.E1 U27.47 | length 512.1
  Top Layer w6.25: U27.47@4852.98,5106.61 4916.57,5106.62 v1(5217.97,4805.22) U1.E1@5233.71,4789.47
MCU_GPIO17: U1.E2 U27.46 | length 562.2
  Top Layer w6.25: U27.46@4852.98,5086.93 4853.9,5086.02 4906.79,5086.02 4990.3,5002.5 4990.3,4979.3 v1(4990,4979) ; v1(5249.46,4805.22) U1.E2@5265.21,4789.47
  Bottom Layer w4: 5182.9,4790.1 5234.35,4790.1 v1(5249.46,4805.22)
  Bottom Layer w6.25: v1(4990,4979) 5178.9,4790.1 5182.9,4790.1
MCU_GPIO18: U1.E3 U27.44 | length 551.3
  Top Layer w6.25: U27.44@4852.98,5047.56 4914.62,5047.56 4945,5017.18 v1(4945,5016) ; v1(5280.96,4805.22) U1.E3@5296.7,4789.47
  Bottom Layer w4: 5202.44,4820.74 5265.44,4820.74 v1(5280.96,4805.22)
  Bottom Layer w6.25: v1(4945,5016) 5007.18,5016 5202.44,4820.74
MCU_GPIO19: U1.E4 U27.43 | length 801.1
  Top Layer w6.25: U27.43@4852.98,5027.87 4853.92,5026.94 4903.06,5026.94 v1(4904,5026) ; v1(5312.45,4805.22) U1.E4@5328.2,4789.47
  Bottom Layer w4: 5206.9,4663.1 5227.01,4663.1 5234.01,4670.1 5234.01,4688.1 5240.64,4694.74 5288.64,4694.74 5328.01,4734.1 5328.01,4789.66 v1(5312.45,4805.22)
  Bottom Layer w6.25: v1(4904,5026) 4904.01,4965.99 5206.9,4663.1
MCU_GPIO20: U1.F2 U27.41 | length 521
  Top Layer w6.25: U27.41@4852.98,4988.5 4853.36,4988.12 4955.88,4988.12 v1(4957,4987) ; v1(5249.46,4773.72) U1.F2@5265.21,4757.97
  Bottom Layer w4: 5202.22,4757.74 5233.48,4757.74 v1(5249.46,4773.72)
  Bottom Layer w6.25: v1(4957,4987) 5186.26,4757.74 5202.22,4757.74
MCU_GPIO21: U1.F3 U27.40 | length 623.1
  Top Layer w6.25: U27.40@4852.98,4968.82 4854.57,4970.41 4922.41,4970.41 v1(4924,4972) ; v1(5280.96,4773.72) U1.F3@5296.7,4757.97
  Bottom Layer w4: 5200.9,4695.1 5227.01,4695.1 5234.01,4702.1 5234.01,4718.1 5242.01,4726.1 5258.77,4726.1 5265.4,4732.74 5265.4,4758.17 v1(5280.96,4773.72)
  Bottom Layer w6.25: v1(4924,4972) 5200.9,4695.1
MCU_GPIO22: U1.J4 U27.38 | length 640.3
  Top Layer w6.25: U27.38@4852.98,4929.45 4853.71,4928.73 4917.27,4928.73 v1(4918,4928) ; v1(5312.45,4679.23) U1.J4@5328.2,4663.48
  Bottom Layer w4: 5210.01,4629.1 5224.01,4629.1 5234.01,4639.1 5234.01,4655.1 5242.01,4663.1 5296.32,4663.1 v1(5312.45,4679.23)
  Bottom Layer w6.25: v1(4918,4928) 5065.13,4780.87 5065.13,4773.98 5210.01,4629.1
MCU_GPIO23: U1.K4 U27.37 | length 698.8
  Top Layer w6.25: U27.37@4852.98,4909.76 4854.86,4907.88 4902.12,4907.88 v1(4904,4906) ; v1(5312.45,4647.74) U1.K4@5328.2,4631.99
  Bottom Layer w4: 5193.9,4569.1 5258.01,4569.1 5265.01,4576.1 5265.01,4600.29 v1(5312.45,4647.74)
  Bottom Layer w6.25: v1(4904,4906) 4902.01,4904.01 4902.01,4860.99 5193.9,4569.1
MCU_GPIO24: U1.K3 U27.36 | length 604.7
  Top Layer w6.25: U27.36@4852.98,4890.08 4854.47,4888.59 4918.52,4888.59 v1(4920.01,4887.1) ; v1(5280.96,4647.74) U1.K3@5296.7,4631.99
  Bottom Layer w4: 5202.22,4600.74 5243.64,4600.74 5279.19,4636.29 5279.19,4645.97 v1(5280.96,4647.74)
  Bottom Layer w6.25: v1(4920.01,4887.1) 4920.01,4870.99 5190.26,4600.74 5202.22,4600.74
MCU_GPIO25: U1.K2 U27.35 | length 545.3
  Top Layer w6.25: U27.35@4852.98,4870.39 4853.68,4869.7 4947.3,4869.7 v1(4948,4869) ; v1(5249.46,4647.74) U1.K2@5265.21,4631.99
  Bottom Layer w4: 5203.9,4615.1 5229.33,4615.1 5249.3,4635.08 5249.3,4647.58 v1(5249.46,4647.74)
  Bottom Layer w6.25: v1(4948,4869) 4950,4869 5203.9,4615.1
MCU_GPIO26: U1.K1 U27.33 | length 463.2
  Top Layer w6.25: U27.33@4852.98,4831.02 5034.68,4831.03 v1(5217.97,4647.74) U1.K1@5233.71,4631.99
MCU_GPIO27: U1.L1 U27.32 | length 481.1
  Top Layer w6.25: U27.32@4852.98,4811.34 4855.76,4808.56 4994.15,4808.56 v1(5217.97,4584.74) U1.L1@5233.71,4600.49
MCU_GPIO28: U1.V11 U27.30 | length 1869.8
  Top Layer w6.25: U27.30@4852.98,4771.97 4909.14,4771.97 4972,4709.11 v1(4972,4671) ; U1.V11@5548.67,4380.02 v1(5564.42,4364.27) ; v1@5813.08,3639.08 v1(5813.2,3639.2)
  Signal layer 3 w4: 5200.33,4600.74 5383.26,4600.74 5404.4,4579.6 5404.4,4549.48 5434.15,4519.74 5501.37,4519.74 5522.01,4499.1 5522.01,4406.03 5564.42,4363.62 v1(5564.42,4364.27)
  Signal layer 3 w6.25: v1(4972,4671) 5027.11,4671 5097.37,4600.74 5200.33,4600.74 ; v1@5564.42,4363.62 5565.08,4363.62 5749.14,4179.55 5750.14,4179.55 5764.69,4165 v1(5766,4165)
  Signal Layer 4 w6.25: v1(5766,4165) 5768.24,4162.76 5777.24,4162.76 5858,4082 5858,3684 v1(5813.2,3639.2)
MCU_GPIO29: U1.W11 U28.30 | length 1847.6
  Top Layer w6.25: U1.W11@5548.67,4348.52 v1(5564.42,4332.78) ; v1(6317,5006) 6327.73,5016.73 U28.30@6364.87,5016.73
  Signal layer 3 w6.25: v1(5564.42,4332.78) 5759.2,4138 5802,4138 5840,4100 v1(6315,4100)
  Signal Layer 4 w6.25: v1(6315,4100) 6339,4124 6339,4984 v1(6317,5006)
  Bottom Layer w6.25: v1@5563.71,4332.07 v1(5564.42,4332.78)
MCU_GPIO30: U1.T11 U27.27 | length 919.9
  Top Layer w6.25: U27.27@4852.98,4712.91 4853.39,4712.51 4897.6,4712.51 v1(4898.01,4712.1) ; U1.T11@5548.67,4443.01 v1(5564.42,4427.27)
  Signal layer 3 w4: 5202.22,4629.1 5398.01,4629.1 5424.01,4603.1 5504.38,4603.1 5517.01,4590.48 5517.01,4541.13 5546.4,4511.74 5546.4,4445.28 v1(5564.42,4427.27)
  Signal layer 3 w6.25: v1(4898.01,4712.1) 5038.01,4712.1 5121.01,4629.1 5202.22,4629.1
MCU_GPIO31: R69.1 U1.U11 U2.1 U27.26 | length 2862.5
  Top Layer w4: 5533,4319 5532.6,4319.4 5532.6,4395.44 U1.U11@5548.67,4411.52
  Top Layer w6.25: v1(4375,3697) 4375,3500 4401.17,3473.83 4411.38,3473.83 U2.1@4420.07,3465.15 4420.07,3407.13 4428.75,3398.45 R69.1@4430.12,3398.45 ; U27.26@4852.98,4693.23 4854.6,4691.61 4897.39,4691.61 v1(4899,4690) ; 5533,4319 5542,4310 v1(5542,4182.27) ; U1.U11@5548.67,4411.52 v1(5564.42,4395.77)
  Signal layer 3 w4: 5202.22,4614.1 5391.54,4614.1 5420.15,4585.48 5420.15,4549.8 5436.95,4533 5510.11,4533 5534.01,4509.1 5534.01,4426.18 v1(5564.42,4395.77)
  Signal layer 3 w6.25: v1(4899,4690) 5036.11,4690 5112.01,4614.1 5202.22,4614.1
  Bottom Layer w6.25: v1(4375,3697) 4419,3741 4851,3741 5159,4049 5409,4049 5542,4182 v1(5542,4182.27)
MCU_GPIO32: J1.93 U1.U13 | length 2285.6
  Top Layer w6.25: U1.U13@5611.66,4411.52 v1(5627.41,4395.77)
  Signal layer 3 w6.25: v1(4214.43,4087.1) 4313.9,4087.1 4645,3756 v1(5624,3756)
  Signal Layer 4 w4: 5611.01,4323.1 5611.4,4323.5 5611.4,4339.1 5627.41,4355.11 v1(5627.41,4395.77)
  Signal Layer 4 w6.25: 5611.01,4323.1 5624,4310.11 v1(5624,3756) v1@5624,3750
  Bottom Layer w6.25: v1(4214.43,4087.1) J1.93@4273.11,4087.1
MCU_GPIO33: J1.95 U1.T13 | length 2195
  Top Layer w6.25: U1.T13@5611.66,4443.01 v1(5627.41,4427.27)
  Signal layer 3 w6.25: v1(4321.01,4054.1) 4636.11,3739 v1(5608,3739)
  Signal Layer 4 w4: 5595.92,4321.3 5595.92,4339.01 5611.01,4354.1 5611.01,4410.86 v1(5627.41,4427.27)
  Signal Layer 4 w6.25: 5595.92,4321.3 5607,4310.22 5607,3878.05 5607.88,3877.18 5607.88,3739.12 v1(5608,3739)
  Bottom Layer w6.25: J1.95@4272.11,4054.1 v1(4321.01,4054.1)
MCU_GPIO34: J1.96 R70.1 R166.1 U1.U14 U2.3 | length 3860.6
  Top Layer w6.25: R70.1@4500.87,3542.45 4498.38,3539.95 U2.3@4420.07,3539.95 4420.07,3563.07 v1(4522.5,3665.5) ; U1.U14@5643.16,4411.52 v1(5658.91,4395.77)
  Signal layer 3 w6.25: v1(4147.01,4052.1) 4149.2,4049.91 4149.2,4040.8 4592,3598 v1(5743,3598)
  Signal Layer 4 w4: 5643.01,4319.1 5643.01,4379.87 v1(5658.91,4395.77)
  Signal Layer 4 w6.25: 5643.01,4319.1 5643.01,3697.99 v1(5743,3598)
  Bottom Layer w6.25: J1.96@4103.11,4052.1 v1(4147.01,4052.1) ; v1(5743,3598) 6092,3249 6416.47,3249 6462.91,3202.56 6466.85,3202.56 6479.47,3189.94 R166.1@6479.47,3186
MCU_GPIO35: U1.T14 U25.47 | length 1006
  Top Layer w6.25: U1.T14@5643.16,4443.01 v1(5658.91,4427.27) ; v1(5811,4099) 6290,4099 6324.4,4133.4 U25.47@6365.74,4133.4
  Signal Layer 4 w4: v1(5658.91,4427.27) 5658.91,4419.2 5674.01,4404.1 5674.01,4359.1 5685.01,4348.1 5697.01,4348.1 5706.01,4339.1 5706.01,4320.1
  Signal Layer 4 w6.25: 5706.01,4320.1 5706.01,4175.99 5783,4099 v1(5811,4099)
MCU_GPIO36: U1.V16 U25.46 | length 888.4
  Top Layer w6.25: U1.V16@5706.15,4380.02 v1(5721.9,4364.27) ; v1(5790,4118) 6283,4118 6318.08,4153.08 U25.46@6365.74,4153.08
  Signal Layer 4 w4: v1(5721.9,4364.27) 5737.9,4348.27 5737.9,4317.03
  Signal Layer 4 w6.25: 5737.01,4318.08 5737.01,4170.99 v1(5790,4118)
MCU_GPIO37: U1.U16 U25.43 | length 768.2
  Top Layer w6.25: U1.U16@5706.15,4411.52 v1(5721.9,4395.77) ; v1(6318,4227) 6319.82,4227 6331.9,4214.92 6362.96,4214.92 U25.43@6365.74,4212.14
  Signal layer 3 w4: v1(5721.9,4395.77) 5723,4394.67 5723,4390.09 5737.01,4376.08 5737.01,4356.99 5745,4349 5764.02,4349 5768.62,4344.4 5768.62,4323.72
  Signal layer 3 w6.25: 5768.62,4323.72 5865.34,4227 v1(6318,4227)
MCU_GPIO38: U1.T16 U25.41 | length 759.5
  Top Layer w6.25: U1.T16@5706.15,4443.01 v1(5721.9,4427.27) ; v1(6316,4252) 6316.25,4251.75 6365.49,4251.75 U25.41@6365.74,4251.51
  Signal layer 3 w4: v1(5721.9,4427.27) 5737.67,4411.5 5737.67,4389.33 5747,4380 5760,4380 5769,4371 5769,4358 5779,4348 5830,4348
  Signal layer 3 w6.25: 5830,4348 5926,4252 v1(6316,4252)
MCU_GPIO39: J2.6 J2.100 U1.W17 | length 3104
  Top Layer w6.25: U1.W17@5737.65,4348.52 v1(5753.4,4332.78)
  Signal layer 3 w6.25: v1(5753.4,4332.78) 5753.4,4268.6 5853,4169 6813,4169 6824,4180 v1(7056,4180)
  Signal Layer 4 w6.25: v1(7056,4180) 7056,5323 7117,5384 7117,5446 v1(7208,5537)
  Bottom Layer w6.25: v1(7056,4180) 7056,4102 7101.76,4056.24 J2.6@7149.24,4056.24 ; J2.100@7149.24,5536.56 7149.68,5537 v1(7208,5537)
MCU_GPIO40: J2.8 U1.V17 | length 1634.5
  Top Layer w6.25: U1.V17@5737.65,4380.02 v1(5753.4,4364.27)
  Signal layer 3 w6.25: v1(5769.01,4196.01) 5832.02,4133 6665,4133 6711,4087 6911.8,4087 6926.8,4102 v1(7093,4102)
  Signal Layer 4 w4: v1(5753.4,4364.27) 5769.01,4348.66 5769.01,4317.03
  Signal Layer 4 w6.25: v1(5769.01,4196.01) 5769.01,4317.03
  Bottom Layer w6.25: v1(7093,4102) 7104.15,4090.85 7146.13,4090.85 J2.8@7149.24,4087.74
MCU_GPIO41: J12.2 U1.U17 | length 3207.6
  Top Layer w6.25: U1.U17@5737.65,4411.52 v1(5753.4,4395.77)
  Signal layer 3 w4: v1(5753.4,4395.77) 5762.23,4395.77 5777.9,4380.1 5828.69,4380.1
  Signal layer 3 w6.25: 5828.69,4380.1 6677.9,4380.1 6687,4371 6757,4371 6916,4530 v1(6916,4579)
  Signal Layer 4 w6.25: v1(6370,6077) 6478,5969 6670,5969 6902,5737 6902,4593 v1(6916,4579)
  Bottom Layer w6.25: v1(6370,6077) 6370.83,6077.83 J12.2@6370.83,6137.61
MCU_GPIO42: TP39.1 U1.D19 U24.25 U24.48 | length 2485.7
  Top Layer w6.25: U24.25@4850.99,5214.59 4803.41,5214.59 4734,5284 4734,5585 4813.57,5664.57 4848.21,5664.57 U24.48@4850.99,5667.35 4874.12,5667.35 4876.9,5670.13 4876.9,5670.9 4901,5695 TP39.1@4935,5695 5813,5695 v1(5855,5653) ; U1.D19@5800.64,4820.97 v1(5816.39,4836.71)
  Signal Layer 4 w6.25: v1(5816.39,4836.71) 5855,4875.32 v1(5855,5653)